# Altium PCB Matrix3.PcbDoc
Units mm, origin at the board's own origin, x right, y up, seen from the top; angles counter-clockwise.
Board outline 200 x 150 mm, 4 copper layers (Top Layer, Internal Plane 1, Internal Plane 2, Bottom Layer); 46 components, 85 nets, 258 pads, 0 vias.
Unrouted connection lines stored in the file: 140.
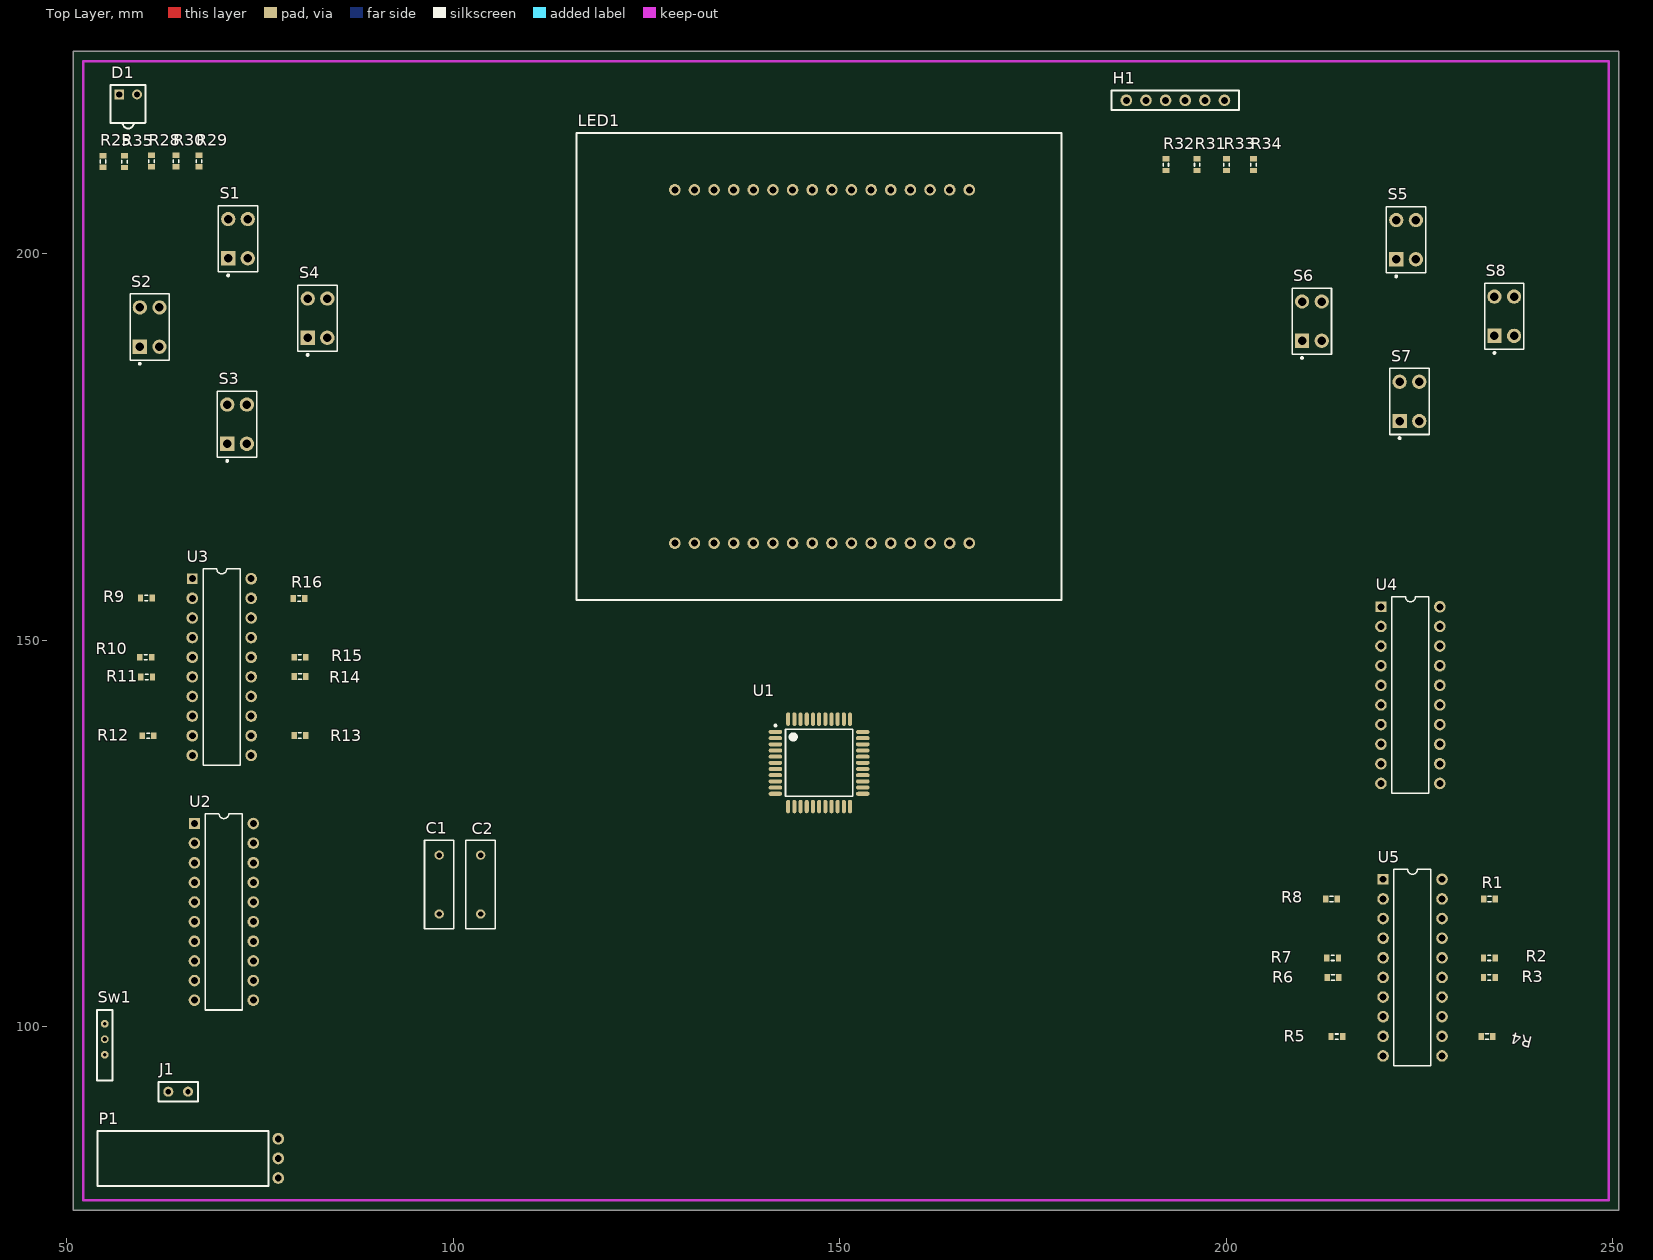
[diagram p0: Top Layer view]
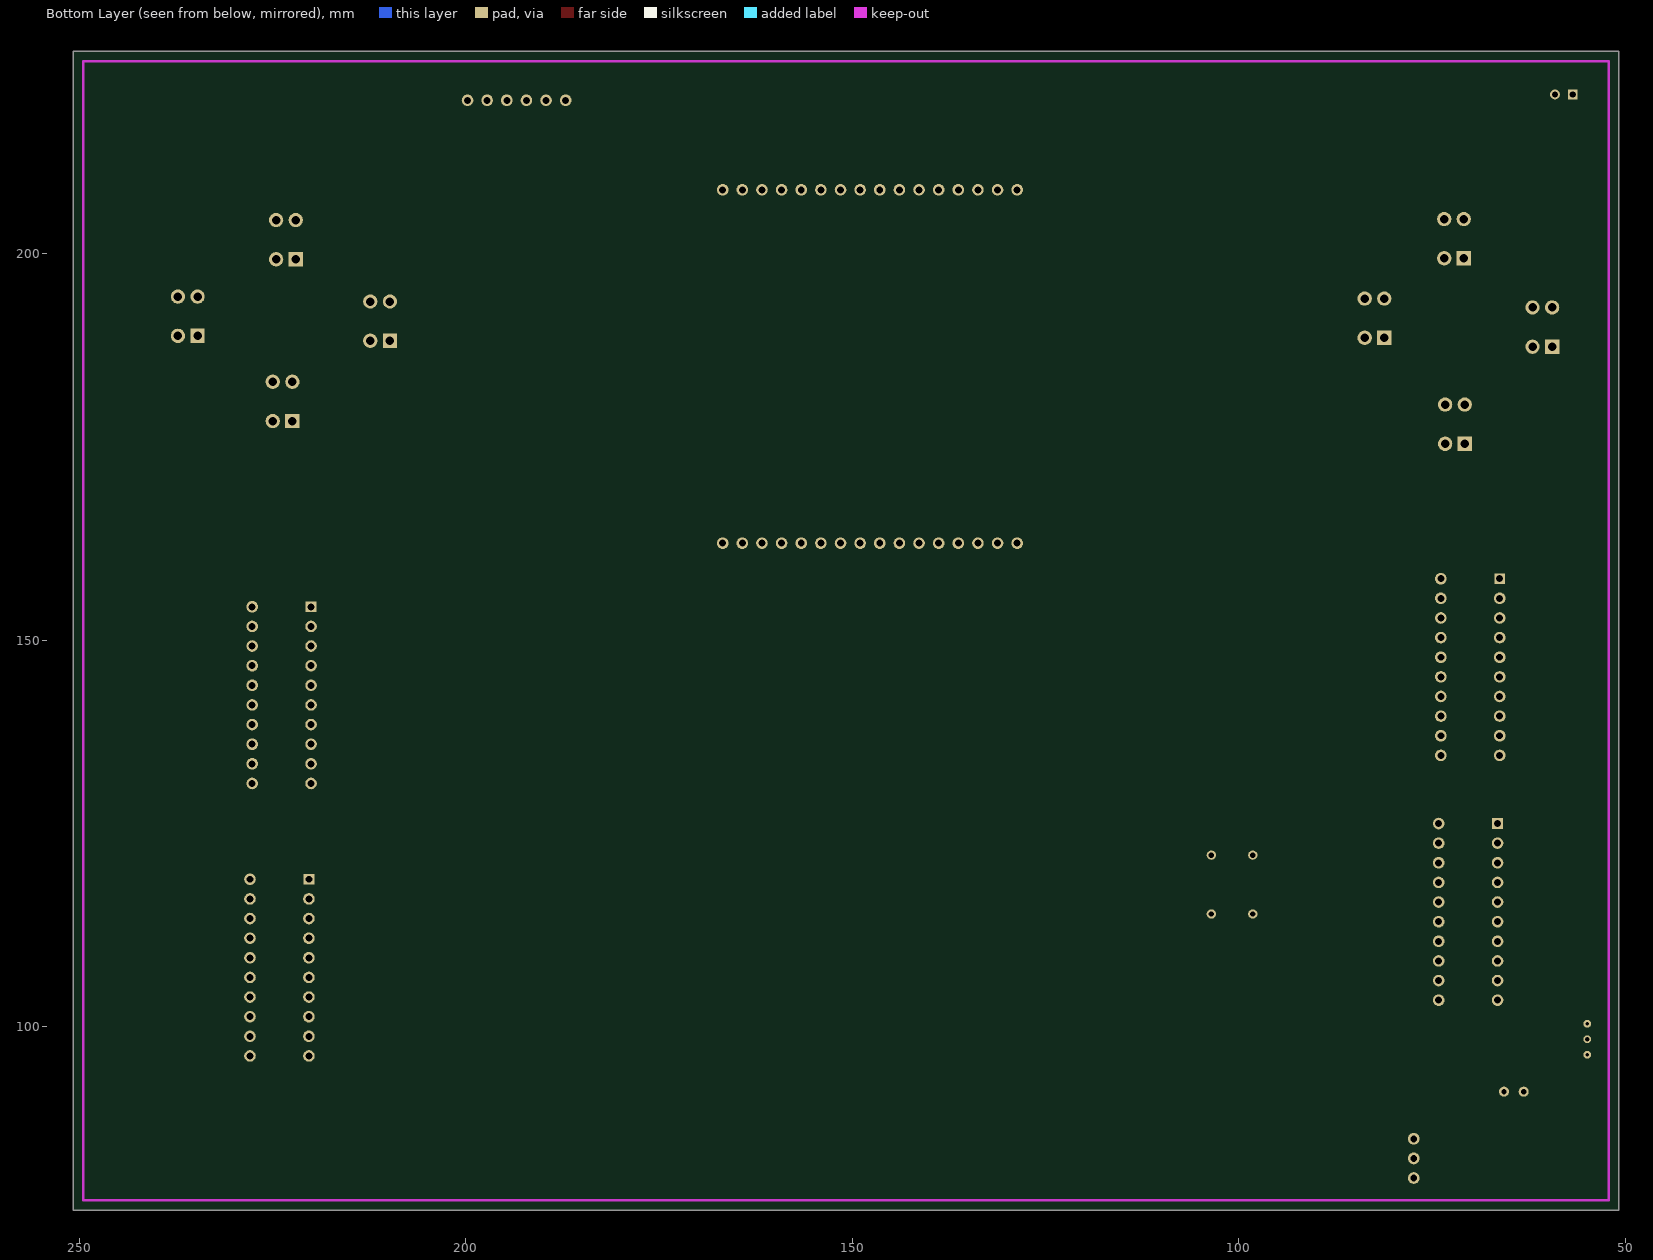
[diagram p1: Bottom Layer view, seen from below]
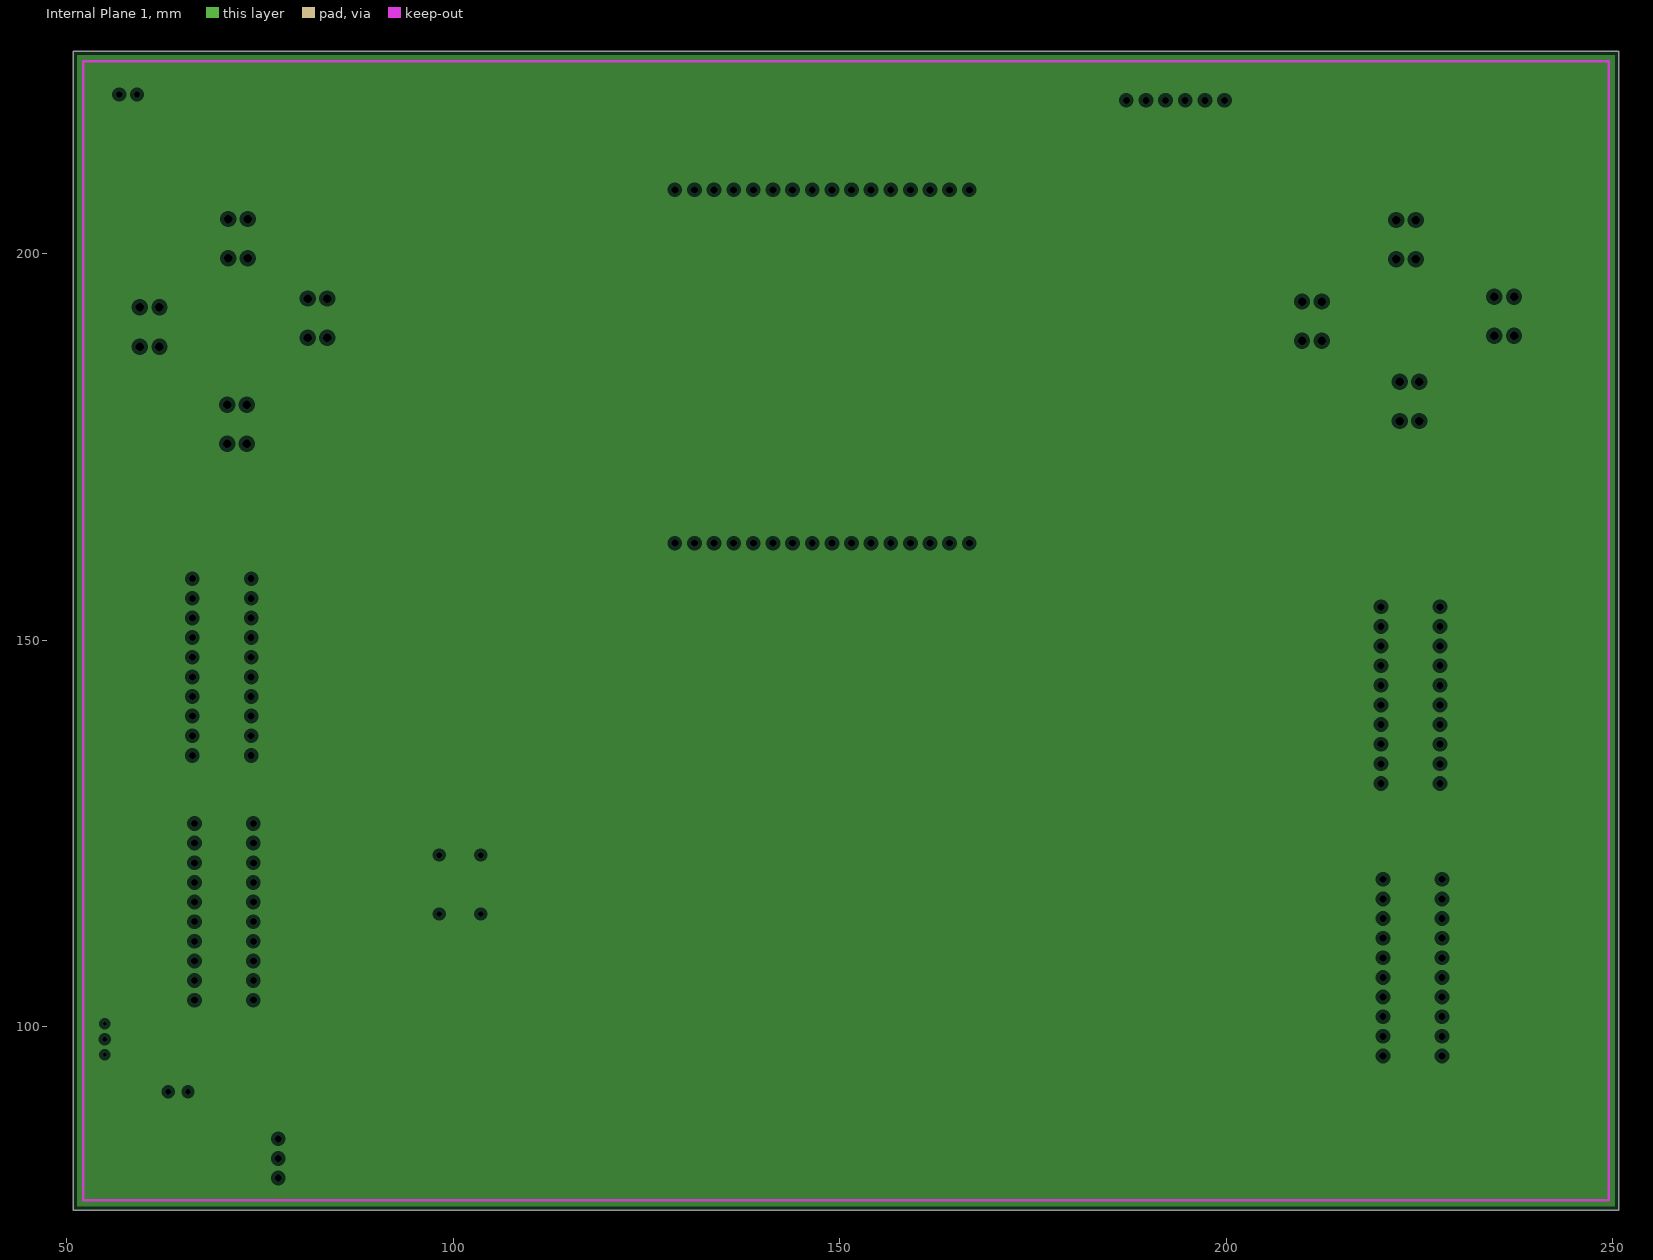
[diagram p2: Internal Plane 1, clearances drawn from the general rule]
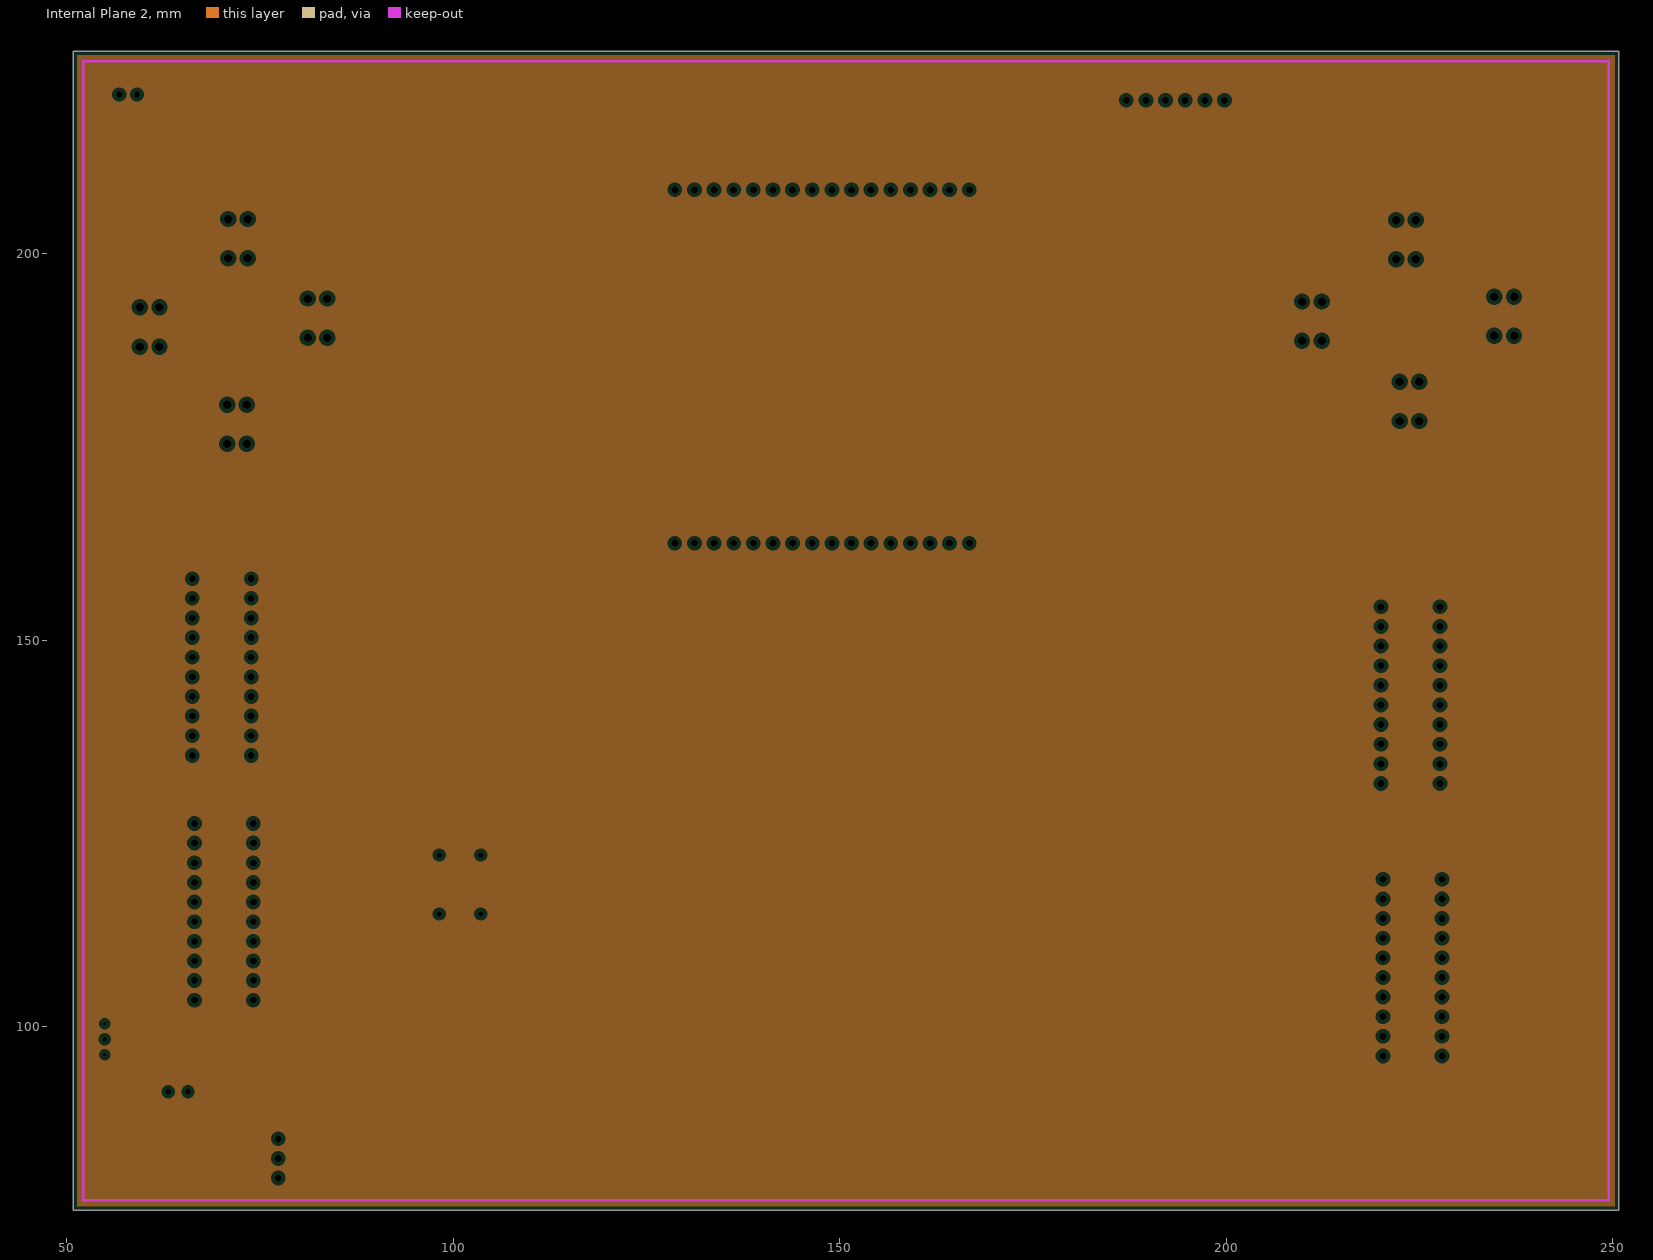
[diagram p3: Internal Plane 2, clearances drawn from the general rule]

## Layer stack, top to bottom
Top Layer: signal copper 0.0356
Dielectric: dielectric 0.32, FR-4, Dk 4.8
Internal Plane 1: plane copper 0.0356
Dielectric: dielectric 0.32, FR-4, Dk 4.8
Internal Plane 2: plane copper 0.0356
Dielectric: dielectric 0.32, FR-4, Dk 4.8
Bottom Layer: signal copper 0.0356

## Board outline
50.8,76.2 250.8,76.2 250.8,226.2 50.8,226.2

## Design rules (kind name [scope] priority, off if disabled: settings)
Clearance [All] p1: gap=0.254
HoleSize [All] p1: absolutevalues=TRUE maxlimit=2.5 minlimit=0.025 maxpercent=80.000 minpercent=20.000
MinimumSolderMaskSliver [All] p1 off: minsoldermaskwidth=0.254
PasteMaskExpansion [All] p1 off: expansion=0
PlaneClearance [All] p1: clearance=0.508
PlaneConnect [All] p1: planeconnectstyle=Relief reliefexpansion=0.508 reliefentries=4 reliefconductorwidth=0.254 reliefairgap=0.254
PolygonConnect [All] p1: connectstyle=Relief reliefconductorwidth=0.254 reliefentries=4 polygonreliefangle="90 Angle"
RoutingVias [All] p1: holewidth=0.7 width=1.4 viastyle="Through Hole" minholewidth=0.7 minwidth=1.2 maxholewidth=0.7 maxwidth=1.4
SMDNeckDown [All] p1: percent=50.000
SilkToSilkClearance [All] p1 off: silktosilkclearance=0.254
SilkscreenOverComponentPads [All] p1 off: minsilkscreentomaskgap=0.254
SolderMaskExpansion [All] p1 off: expansion=0.102
Width [All] p1: maxlimit=0.762 minlimit=0.254 preferedwidth=0.381
21 further rules are at their usual default settings.

## Components (designator, comment, footprint, x,y, rotation, side; value= is the part's Value field where it differs from the comment)
C1 "Cap" RAD-0.3 98.171,118.364 r270 top
C2 "Cap" RAD-0.3 103.53,118.364 r270 top
D1 "LED" LED-5608F 56.769,220.599 r0 top
H1 "6-pin Header" "6-pin Header" 193.421,219.837 r180 top
J1 "two-holes" two-holes 64.389,91.567 r180 top
LED1 "8x8 RGB Matrix" "8x8 RGB Matrix" 146.431,185.395 r0 top
P1 "1016-1538-5-ND" 1016-1538-5-ND 77.343,82.931 r90 top
R1 "Res3" J1-0603 234.061,116.51 r0 top
R2 "Res3" J1-0603 234.036,108.89 r180 top
R3 "Res3" J1-0603 234.036,106.35 r180 top
R4 "Res3" J1-0603 233.731,98.704 r180 top
R5 "Res3" J1-0603 214.3,98.679 r0 top
R6 "Res3" J1-0603 213.817,106.324 r0 top
R7 "Res3" J1-0603 213.766,108.89 r0 top
R8 "Res3" J1-0603 213.614,116.51 r0 top
R9 "Res3" J1-0603 60.274,155.423 r0 top
R10 "Res3" J1-0603 60.198,147.777 r180 top
R11 "Res3" J1-0603 60.325,145.237 r180 top
R12 "Res3" J1-0603 60.503,137.617 r180 top
R13 "Res3" J1-0603 80.137,137.643 r180 top
R14 "Res3" J1-0603 80.162,145.263 r0 top
R15 "Res3" J1-0603 80.137,147.777 r0 top
R16 "Res3" J1-0603 80.035,155.397 r0 top
R25 "Res25" J1-0603 54.661,211.912 r90 top
R28 "Res3" J1-0603 60.96,211.963 r90 top
R29 "Res3" J1-0603 67.107,211.963 r90 top
R30 "Res3" J1-0603 64.11,211.963 r90 top
R31 "Res3" J1-0603 196.24,211.506 r90 top
R32 "Res3" J1-0603 192.176,211.506 r90 top
R33 "Res3" J1-0603 200.05,211.506 r90 top
R34 "Res3" J1-0603 203.505,211.506 r90 top
R35 "Res3" J1-0603 57.429,211.887 r90 top
S1 "SW-DPST" DPST-4 72.136,201.93 r90 top
S2 "SW-DPST" DPST-4 60.706,190.5 r90 top
S3 "SW-DPST" DPST-4 72.009,177.927 r90 top
S4 "SW-DPST" DPST-4 82.423,191.643 r90 top
S5 "SW-DPST" DPST-4 223.266,201.803 r90 top
S6 "SW-DPST" DPST-4 211.074,191.262 r90 top
S7 "SW-DPST" DPST-4 223.698,180.873 r90 top
S8 "SW-DPST" DPST-4 235.966,191.897 r90 top
Sw1 "563-1090-ND" 563-1090-ND 54.889,98.349 r270 top
U1 "PIC18F4550-I/PT" TQFP-PT44_N 147.32,134.112 r0 top
U2 "74HC373" 74HC373 66.497,126.263 r0 top
U3 "74HC373" 74HC373 66.218,157.937 r0 top
U4 "74HC373" 74HC373 220.015,154.305 r0 top
U5 "74HC373" 74HC373 220.294,119.05 r0 top

## Footprints (in the part's own frame and the unit in brackets; to place one, negate y for a bottom-side part, rotate by r counter-clockwise, add the part's x,y. Pads: shape width x height; smd on the part's side, far side on the other; paste and mask are expansions set on the pad)
"6-pin Header" [mm]
  round 1.5 hole 0.9: 1(-6.35,0) 2(-3.81,0) 3(-1.27,0) 4(1.27,0) 5(3.81,0) 6(6.35,0)
  silkscreen extent -8.25,-1.27 8.25,1.27
"8x8 RGB Matrix" [mm]
  round 1.5 hole 0.9: 1(-17.78,-22.86) 2(-15.24,-22.86) 3(-12.7,-22.86) 4(-10.16,-22.86) 5(-7.62,-22.86) 6(-5.08,-22.86) 7(-2.54,-22.86) 8(0,-22.86) 9(2.54,-22.86) 10(5.08,-22.86) 11(7.62,-22.86) 12(10.16,-22.86) 13(12.7,-22.86) 14(15.24,-22.86) 15(17.78,-22.86) 16(20.32,-22.86) 17(20.32,22.86) 18(17.78,22.86) 19(15.24,22.86) 20(12.7,22.86) 21(10.16,22.86) 22(7.62,22.86) 23(5.08,22.86) 24(2.54,22.86) 25(0,22.86) 26(-2.54,22.86) 27(-5.08,22.86) 28(-7.62,22.86) 29(-10.16,22.86) 30(-12.7,22.86) 31(-15.24,22.86) 32(-17.78,22.86)
  silkscreen extent -30.48,-30.23 32.26,30.23
74HC373 [mm]
  rect 1.4x1.4 hole 0.9: 1(0,0)
  round 1.5 hole 0.9: 2(0,-2.54) 3(0,-5.08) 4(0,-7.62) 5(0,-10.16) 6(0,-12.7) 7(0,-15.24) 8(0,-17.78) 9(0,-20.32) 10(0,-22.86) 11(7.62,-22.86) 12(7.62,-20.32) 13(7.62,-17.78) 14(7.62,-15.24) 15(7.62,-12.7) 16(7.62,-10.16) 17(7.62,-7.62) 18(7.62,-5.08) 19(7.62,-2.54) 20(7.62,0)
  silkscreen extent 1.4,-24.13 6.19,1.27
563-1090-ND [mm]
  round 1 hole 0.5: 1(-2,0) 3(2,0)
  round 1 hole 0.6: 2(0,0)
  silkscreen extent -3.81,-1.02 5.33,1.02
1016-1538-5-ND [mil]
  round 60 hole 35.43: 0(-100,0) 1(0,0) 2(100,0)
  silkscreen extent -140,50 140,920
DPST-4 [mm] "Switch; 4 Leads"
  rect 1.85x1.85 hole 1.1: 1(-2.54,1.27)
  round 1.85 hole 1.1: 2(-2.54,-1.27) 3(2.54,-1.27) 4(2.54,1.27)
  silkscreen extent -4.88,-2.54 4.28,2.54
J1-0603 [mm] "Chip Resistor, Body 1.6x0.8mm, IPC High Density"
  rect 0.7x0.9 smd: 1(-0.75,0) 2(0.75,0)
  silkscreen extent -0.2,-0.35 0.2,0.35, body extent -0.85,-0.48 0.85,0.48, height 0.9
LED-5608F [mil]
  rect 50x50 hole 32: A(0,0)
  round 50 hole 32: K(90.55,0)
  silkscreen extent -45,-174 133,48
RAD-0.3 [mm] "Radial Cap, Thru-Hole; 2 Leads; 0.3 in Pin Spacing"
  round 1.2 hole 0.7: 1(-3.81,0) 2(3.81,0)
  silkscreen extent -5.71,-1.91 5.71,1.91
TQFP-PT44_N [mm] "Thin QFP, 44-Leads, Body 10x10mm, Pitch 0.8mm, IPC Medium Density"
  oval 1.75x0.525 smd: 1(-5.65,4) 2(-5.65,3.2) 3(-5.65,2.4) 4(-5.65,1.6) 5(-5.65,0.8) 6(-5.65,0) 7(-5.65,-0.8) 8(-5.65,-1.6) 9(-5.65,-2.4) 10(-5.65,-3.2) 11(-5.65,-4) 23(5.65,-4) 24(5.65,-3.2) 25(5.65,-2.4) 26(5.65,-1.6) 27(5.65,-0.8) 28(5.65,0) 29(5.65,0.8) 30(5.65,1.6) 31(5.65,2.4) 32(5.65,3.2) 33(5.65,4)
  oval 0.525x1.75 smd: 12(-4,-5.65) 13(-3.2,-5.65) 14(-2.4,-5.65) 15(-1.6,-5.65) 16(-0.8,-5.65) 17(0,-5.65) 18(0.8,-5.65) 19(1.6,-5.65) 20(2.4,-5.65) 21(3.2,-5.65) 22(4,-5.65) 34(4,5.65) 35(3.2,5.65) 36(2.4,5.65) 37(1.6,5.65) 38(0.8,5.65) 39(0,5.65) 40(-0.8,5.65) 41(-1.6,5.65) 42(-2.4,5.65) 43(-3.2,5.65) 44(-4,5.65)
  silkscreen extent -5.77,-4.35 4.35,4.95, body extent -5,-5 5,5, height 1.2
two-holes [mm]
  round 1.3 hole 0.7: 1(-1.27,0) 2(1.27,0)
  silkscreen extent -2.54,-1.27 2.54,1.27

## Part data
C1 C2: "Capacitor"
D1: "Light Emitting Diode LED"
R1 R2 R3 R4 R5 R6 R7 R8 R9 R10 R11 R12 R13 R14 R15 R16 R28 R29 R30 R31 R32 R33 R34 R35: "Resistor"
R25: library part Res3, "Resistor"
S1 S2 S3 S4 S5 S6 S7 S8: "Double-Pole, Single-Throw Switch"
U1: "High Performance, Enhanced Flash, USB Microcontroller with nanoWatt Technology, 32K Flash, 44-Pin TQFP, Industrial Temperature Range"

## Nets (pads, with @x,y where several pads share a name; then routed paths per layer and width w, separated by ;. In a path a pad name is that pad's centre, name@x,y a point inside that pad or via, vN(x,y) a via of type N, cw(c..) or ccw(c..) an arc to the next point about the centre after c; other vN are vias at no path point)
!OE: U1.19 U2.1 U3.1 U4.1 U5.1
BL0: LED1.1 U2.2
BL1: LED1.2 U2.5
BL2: LED1.3 U2.6
BL3: LED1.4 U2.9
BL4: LED1.5 U2.12
BL5: LED1.6 U2.15
BL6: LED1.7 U2.16
BL7: LED1.8 U2.19
BLE: U1.22 U2.11
DATA0: U1.8 U2.3 U3.3 U4.3 U5.3
DATA1: U1.9 U2.4 U3.4 U4.4 U5.4
DATA2: U1.10 U2.7 U3.7 U4.7 U5.7
DATA3: U1.11 U2.8 U3.8 U4.8 U5.8
DATA4: U1.14 U2.13 U3.13 U4.13 U5.13
DATA5: U1.15 U2.14 U3.14 U4.14 U5.14
DATA6: U1.16 U2.17 U3.17 U4.17 U5.17
DATA7: U1.17 U2.18 U3.18 U4.18 U5.18
GN0: LED1.28 U4.2
GN1: LED1.27 U4.5
GN2: LED1.26 U4.6
GN3: LED1.25 U4.9
GN4: LED1.24 U4.12
GN5: LED1.23 U4.15
GN6: LED1.22 U4.16
GN7: LED1.21 U4.19
GND: C1.1 C2.1 D1.K H1.3 J1.2 P1.1 U1.6 U1.29 U1.30 U2.10 U3.10 U4.10 U5.10
GNE: U1.21 U4.11
NetC1_2: C1.2 P1.0 Sw1.1
NetD1_A: D1.A R25.2
NetH1_1: H1.1 U1.18
NetH1_4: H1.4 U1.13
NetH1_5: H1.5 U1.12
NetJ1_1: J1.1 Sw1.2
NetLED1_9: LED1.9 R9.2
NetLED1_10: LED1.10 R10.2
NetLED1_11: LED1.11 R11.2
NetLED1_12: LED1.12 R12.2
NetLED1_13: LED1.13 R13.2
NetLED1_14: LED1.14 R14.2
NetLED1_15: LED1.15 R15.2
NetLED1_16: LED1.16 R16.2
NetLED1_17: LED1.17 R8.1
NetLED1_18: LED1.18 R7.1
NetLED1_19: LED1.19 R6.1
NetLED1_20: LED1.20 R5.1
NetLED1_29: LED1.29 R4.1
NetLED1_30: LED1.30 R3.1
NetLED1_31: LED1.31 R2.1
NetLED1_32: LED1.32 R1.1
NetR28_1: R28.1 S1.4
NetR29_1: R29.1 S3.2
NetR30_1: R30.1 S4.2
NetR31_1: R31.1 S5.4
NetR32_1: R32.1 S6.4
NetR33_1: R33.1 S7.2
NetR34_1: R34.1 S8.2
NetR35_1: R35.1 S2.4
RD0: R9.1 U3.2
RD1: R10.1 U3.5
RD2: R11.1 U3.6
RD3: R12.1 U3.9
RD4: R13.1 U3.12
RD5: R14.1 U3.15
RD6: R15.1 U3.16
RD7: R16.1 U3.19
RDE: U1.20 U3.11
ROW0: R8.2 U5.2
ROW1: R7.2 U5.5
ROW2: R6.2 U5.6
ROW3: R5.2 U5.9
ROW4: R4.2 U5.12
ROW5: R3.2 U5.15
ROW6: R2.2 U5.16
ROW7: R1.2 U5.19
ROWE: U1.23 U5.11
SW1: S1.3 U1.32
SW2: S2.3 U1.35
SW3: S3.1 U1.36
SW4: S4.1 U1.42
SW5: S8.1 U1.43
SW6: S7.1 U1.44
SW7: S6.3 U1.1
SW8: S5.3 U1.24
VCC: C2.2 H1.2 P1.2 R25.1 R28.2 R29.2 R30.2 R31.2 R32.2 R33.2 R34.2 R35.2 U1.7 U1.28 U2.20 U3.20 U4.20 U5.20
pads on no net: H1.6 S1.1 S1.2 S2.1 S2.2 S3.3 S3.4 S4.3 S4.4 S5.1 S5.2 S6.1 S6.2 S7.3 S7.4 S8.3 S8.4 Sw1.3 U1.2 U1.3 U1.4 U1.5 U1.25 U1.26 U1.27 U1.31 U1.33 U1.34 U1.37 U1.38 U1.39 U1.40 U1.41

## Polygon pours and split planes (outlines as drawn)
no net on Internal Plane 1 (split plane): 250.29,76.71 51.31,76.71 51.31,225.69 250.29,225.69
no net on Internal Plane 2 (split plane): 250.29,76.71 51.31,76.71 51.31,225.69 250.29,225.69

## Keep-outs
Keep-Out Layer:
  lines w0.3: 52.1,77.5 52.1,224.9 249.5,224.9 249.5,77.5 52.1,77.5

## Silkscreen, mask and mechanical layers (free items; w line width, h text height)
Drill Drawing:
  text ".LEGEND" at 255.88,81.28 h1.52
  text "Drill Drawing." at 255.88,78.74 h1.52

## Dimensions
52.1,77.5 to 52.1,224.9 on Mechanical 1
52.1,77.5 to 249.5,77.5 on Mechanical 1